# Altium PCB PCB1.PcbDoc (part 3 of 3)
Units mm, origin at the board's own origin, x right, y up, seen from the top; angles counter-clockwise.
Board outline 40 x 42 mm, 4 copper layers (Top Layer, GND, VCC, Bottom Layer), stack 4.941 mm thick; 42 components, 33 nets, 156 pads, 53 vias.
Unrouted connection lines stored in the file: 1.
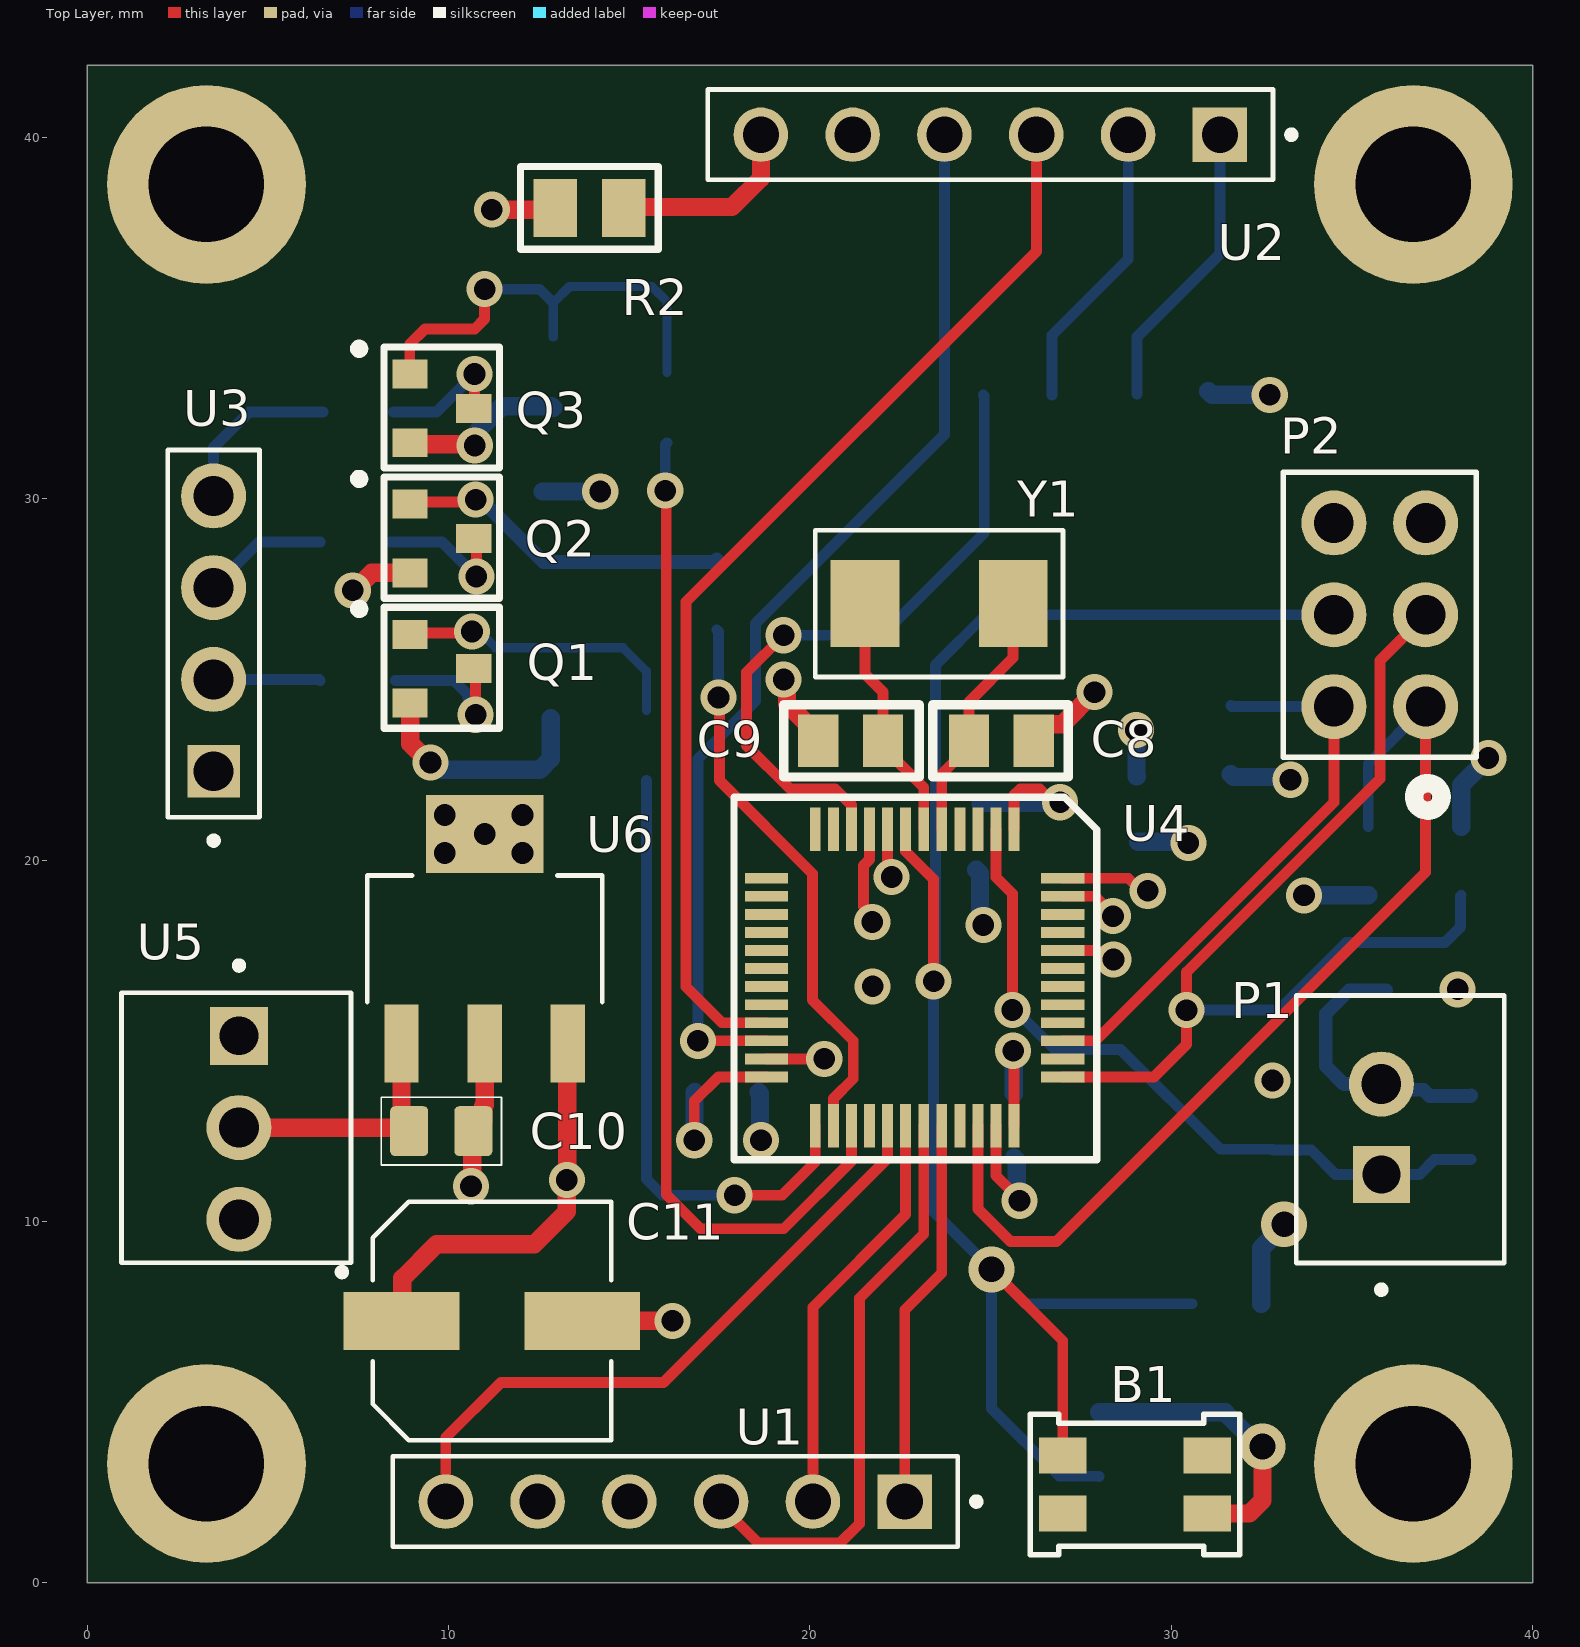
[diagram p0: Top Layer view]

## Part data (continued)
U4: "MCU 32-bit STM32F1 ARM Cortex M3 RISC 64KB Flash 2.5V/3.3V 48-Pin LQFP Tray", Case/Package=LQFP, Clock Frequency=16MHz, Frequency=72MHz, LCSC=C8734, Manufacturer=STMicroelectronics, Manufacturer Package Identifier=ai14911d, Max Operating Temperature=85°C, Max Power Dissipation=363mW, Max Supply Current=50mA, Max Supply Voltage=3.6V, Min Operating Temperature=-40°C, Min Supply Voltage=2V, Nominal Supply Current=1.7µA, Operating Supply Voltage=3.3V, Supplier Part Number=497-6063-ND, ADC Channels (Resolution)="10-Ch 12-Bit", Address Bus Width=32b, Category=Microcontrollers, China RoHS=Compliant, ComponentLink1Description=https://datasheet.octopart.com:443/STM32F103C8T6-STMicroelectronics-datasheet-48026265.pdf?src-supplier=ICpick, ComponentLink1URL=https://datasheet.octopart.com:443/STM32F103C8T6-STMicroelectronics-datasheet-48026265.pdf?src-supplier=ICpick, ComponentLink2Description=https://datasheet.octopart.com:443/STM32F103C8T6-STMicroelectronics-datasheet-10330614.pdf?src-supplier=Newark, ComponentLink2URL=https://datasheet.octopart.com:443/STM32F103C8T6-STMicroelectronics-datasheet-10330614.pdf?src-supplier=Newark, ComponentLink3Description=https://datasheet.octopart.com:443/STM32F103C8T6-STMicroelectronics-datasheet-16839800.pdf?src-supplier=Newark, ComponentLink3URL=https://datasheet.octopart.com:443/STM32F103C8T6-STMicroelectronics-datasheet-16839800.pdf?src-supplier=Newark, ComponentLink4Description=https://datasheet.octopart.com:443/STM32F103C8T6-STMicroelectronics-datasheet-14363502.pdf?src-supplier=Farnell, ComponentLink4URL=https://datasheet.octopart.com:443/STM32F103C8T6-STMicroelectronics-datasheet-14363502.pdf?src-supplier=Farnell, ComponentLink5Description=https://datasheet.octopart.com:443/STM32F103C8T6-STMicroelectronics-datasheet-500013.pdf?src-supplier=Farnell, ComponentLink5URL=https://datasheet.octopart.com:443/STM32F103C8T6-STMicroelectronics-datasheet-500013.pdf?src-supplier=Farnell, ComponentLink6Description=https://datasheet.octopart.com:443/STM32F103C8T6-STMicroelectronics-datasheet-8365036.pdf?src-supplier=Farnell, ComponentLink6URL=https://datasheet.octopart.com:443/STM32F103C8T6-STMicroelectronics-datasheet-8365036.pdf?src-supplier=Farnell, ComponentLink7Description=https://datasheet.octopart.com:443/STM32F103C8T6-STMicroelectronics-datasheet-6396519.pdf?src-supplier=Verical, ComponentLink7URL=https://datasheet.octopart.com:443/STM32F103C8T6-STMicroelectronics-datasheet-6396519.pdf?src-supplier=Verical, ComponentLink8Description=https://datasheet.octopart.com:443/STM32F103C8T6-STMicroelectronics-datasheet-21407612.pdf?src-supplier=element14+APAC, ComponentLink8URL=https://datasheet.octopart.com:443/STM32F103C8T6-STMicroelectronics-datasheet-21407612.pdf?src-supplier=element14+APAC, ComponentLink9Description=https://datasheet.octopart.com:443/STM32F103C8T6-STMicroelectronics-datasheet-8700640.pdf?src-supplier=element14, ComponentLink9URL=https://datasheet.octopart.com:443/STM32F103C8T6-STMicroelectronics-datasheet-8700640.pdf?src-supplier=element14, ComponentLink10Description=https://datasheet.octopart.com:443/STM32F103C8T6-STMicroelectronics-datasheet-177520228.pdf?src-supplier=Burklin+Elektronik, ComponentLink10URL=https://datasheet.octopart.com:443/STM32F103C8T6-STMicroelectronics-datasheet-177520228.pdf?src-supplier=Burklin+Elektronik, ComponentLink11Description=https://datasheet.octopart.com:443/STM32F103C8T6-STMicroelectronics-datasheet-165583531.pdf?src-supplier=SOS+electronic, ComponentLink11URL=https://datasheet.octopart.com:443/STM32F103C8T6-STMicroelectronics-datasheet-165583531.pdf?src-supplier=SOS+electronic, ComponentLink12Description=https://datasheet.octopart.com:443/STM32F103C8T6-STMicroelectronics-datasheet-14106722.pdf?src-supplier=iiiC, ComponentLink12URL=https://datasheet.octopart.com:443/STM32F103C8T6-STMicroelectronics-datasheet-14106722.pdf?src-supplier=iiiC, ComponentLink13Description=https://datasheet.octopart.com:443/STM32F103C8T6-STMicroelectronics-datasheet-17594274.pdf?src-supplier=TME, ComponentLink13URL=https://datasheet.octopart.com:443/STM32F103C8T6-STMicroelectronics-datasheet-17594274.pdf?src-supplier=TME, ComponentLink14Description=https://datasheet.octopart.com:443/STM32F103C8T6-STMicroelectronics-datasheet-148251.pdf?src-supplier=Nu+Horizons, ComponentLink14URL=https://datasheet.octopart.com:443/STM32F103C8T6-STMicroelectronics-datasheet-148251.pdf?src-supplier=Nu+Horizons, Core Architecture=ARM, Data Bus Width=32b, Density=512kb, EEPROM Memory Size=0B, Flash Memory Size=64kB, Height=1.45mm, Height - Seated (Max)=1.6mm, Interface="CAN, USB", Lead Free="Lead Free", Length=7mm, Lifecycle Status=Production, Manufacturer Part Number=STM32F103C8T6, Memory Format=FLASH, Memory Size=64kB, Mounting Technology="Surface Mount", Number of A/D Converters=2, Number of ADC Channels=10, Number of Bits=32, Number of Channels=10, Number of I2C Channels=2, Number of I/Os=37, Number of Interrupts=16, Number of Programmable I/O=48, Number of PWM Channels=1, Number of SPI Channels=2, Number of Terminals=48, Number of Timers/Counters=4, Number of USART Channels=3, Oscillator Type=Internal, Peripherals=POR, Pins=48, Pricing="1=6,08, 10=4,662, 25=4,3084, 100=3,9192, 250=3,73372, 500=3,6219, 1000=3,5299, 2500=3,43276 (USD)", Radiation Hardening=No, RAM Size=20kB, REACH SVHC=Yes, RoHS=Compliant, Schedule B=8542310000, Stock=4493, Supplier=DigiKey, Terminal Pitch=500µm, Termination=SMD/SMT, Watchdog Timer=Yes, Width=7mm
U5: "KK 254 Solid Header, Vertical, with Friction Lock, 3 Circuits, Tin (Sn) Plating, Bag", Color=White, Contact Resistance=10mΩ, Current Rating=4A, Dielectric Material=Polyamide, Flammability Rating="UL94 V-0", Insulation Resistance=1GΩ, LCSC=C234181, Manufacturer=Molex, Manufacturer Lifecycle Status=ACTIVE, Max Operating Temperature=75°C, Min Operating Temperature=0°C, Operating Force=4.8928N, Supplier Part Number=WM4201-ND, Voltage Rating=500V, Voltage Rating (DC)=250V, Approvals="CSA, UL", Category="Headers and Wire Housings", China RoHS=Compliant, ComponentLink1Description=https://sigma.octopart.com:443/153641738/technical_drawing/Molex-22232031.pdf?src-supplier=Sager+Electronics, ComponentLink1URL=https://sigma.octopart.com:443/153641738/technical_drawing/Molex-22232031.pdf?src-supplier=Sager+Electronics, ComponentLink2Description=https://datasheet.octopart.com:443/0022232031-Molex-datasheet-164461539.pdf?src-supplier=Sager+Electronics, ComponentLink2URL=https://datasheet.octopart.com:443/0022232031-Molex-datasheet-164461539.pdf?src-supplier=Sager+Electronics, ComponentLink3Description=https://datasheet.octopart.com:443/22-23-2031-Molex-datasheet-10979265.pdf?src-supplier=Upverter, ComponentLink3URL=https://datasheet.octopart.com:443/22-23-2031-Molex-datasheet-10979265.pdf?src-supplier=Upverter, ComponentLink4Description=https://datasheet.octopart.com:443/22-23-2031-Molex-datasheet-8803345.pdf?src-supplier=Upverter, ComponentLink4URL=https://datasheet.octopart.com:443/22-23-2031-Molex-datasheet-8803345.pdf?src-supplier=Upverter, ComponentLink5Description=https://datasheet.octopart.com:443/022232031-Molex-datasheet-8349839.pdf?src-supplier=Upverter, ComponentLink5URL=https://datasheet.octopart.com:443/022232031-Molex-datasheet-8349839.pdf?src-supplier=Upverter, ComponentLink6Description=https://datasheet.octopart.com:443/22-23-2031-Molex-datasheet-137053720.pdf?src-supplier=IHS, ComponentLink6URL=https://datasheet.octopart.com:443/22-23-2031-Molex-datasheet-137053720.pdf?src-supplier=IHS, ComponentLink7Description=https://datasheet.octopart.com:443/A-6373-03A222-Molex-datasheet-11014486.pdf?src-supplier=IHS, ComponentLink7URL=https://datasheet.octopart.com:443/A-6373-03A222-Molex-datasheet-11014486.pdf?src-supplier=IHS, ComponentLink8Description=https://datasheet.octopart.com:443/22-23-2031-Molex-datasheet-13784869.pdf?src-supplier=Molex, ComponentLink8URL=https://datasheet.octopart.com:443/22-23-2031-Molex-datasheet-13784869.pdf?src-supplier=Molex, ComponentLink9Description=https://sigma.octopart.com:443/16295904/technical_drawing/Molex-22-23-2031.pdf?src-supplier=Molex, ComponentLink9URL=https://sigma.octopart.com:443/16295904/technical_drawing/Molex-22-23-2031.pdf?src-supplier=Molex, ComponentLink10Description=https://datasheet.octopart.com:443/22-23-2031-Molex-datasheet-154747105.pdf?src-supplier=Master+Electronics, ComponentLink10URL=https://datasheet.octopart.com:443/22-23-2031-Molex-datasheet-154747105.pdf?src-supplier=Master+Electronics, ComponentLink11Description=https://datasheet.octopart.com:443/22-23-2031-Molex-datasheet-101581837.pdf?src-supplier=Farnell, ComponentLink11URL=https://datasheet.octopart.com:443/22-23-2031-Molex-datasheet-101581837.pdf?src-supplier=Farnell, ComponentLink12Description=https://datasheet.octopart.com:443/22-23-2031-Molex-datasheet-6994.pdf?src-supplier=Farnell, ComponentLink12URL=https://datasheet.octopart.com:443/22-23-2031-Molex-datasheet-6994.pdf?src-supplier=Farnell, ComponentLink13Description=https://datasheet.octopart.com:443/22-23-2031-Molex-datasheet-15766289.pdf?src-supplier=Farnell, ComponentLink13URL=https://datasheet.octopart.com:443/22-23-2031-Molex-datasheet-15766289.pdf?src-supplier=Farnell, ComponentLink14Description=https://datasheet.octopart.com:443/22-23-2031-Molex-datasheet-11538079.pdf?src-supplier=Farnell, ComponentLink14URL=https://datasheet.octopart.com:443/22-23-2031-Molex-datasheet-11538079.pdf?src-supplier=Farnell, ComponentLink15Description=https://datasheet.octopart.com:443/22-23-2031-Molex-datasheet-21538527.pdf?src-supplier=Electro+Sonic, ComponentLink15URL=https://datasheet.octopart.com:443/22-23-2031-Molex-datasheet-21538527.pdf?src-supplier=Electro+Sonic, ComponentLink16Description=https://datasheet.octopart.com:443/22-23-2031-Molex-datasheet-62103463.pdf?src-supplier=Electro+Sonic, ComponentLink16URL=https://datasheet.octopart.com:443/22-23-2031-Molex-datasheet-62103463.pdf?src-supplier=Electro+Sonic, ComponentLink17Description=https://datasheet.octopart.com:443/22-23-2031-Molex-datasheet-37168844.pdf?src-supplier=Electro+Sonic, ComponentLink17URL=https://datasheet.octopart.com:443/22-23-2031-Molex-datasheet-37168844.pdf?src-supplier=Electro+Sonic, ComponentLink18Description=https://datasheet.octopart.com:443/22-23-2031-Molex-datasheet-26579529.pdf?src-supplier=TME, ComponentLink18URL=https://datasheet.octopart.com:443/22-23-2031-Molex-datasheet-26579529.pdf?src-supplier=TME, ComponentLink19Description=https://datasheet.octopart.com:443/22-23-2031-Molex-datasheet-140181014.pdf?src-supplier=RS+(Formerly+Allied+Electronics), ComponentLink19URL=https://datasheet.octopart.com:443/22-23-2031-Molex-datasheet-140181014.pdf?src-supplier=RS+(Formerly+Allied+Electronics), ComponentLink20Description=https://datasheet.octopart.com:443/22-23-2031-Molex-datasheet-120145304.pdf?src-supplier=RS+(Formerly+Allied+Electronics), ComponentLink20URL=https://datasheet.octopart.com:443/22-23-2031-Molex-datasheet-120145304.pdf?src-supplier=RS+(Formerly+Allied+Electronics), ComponentLink21Description=https://datasheet.octopart.com:443/22-23-2031-Molex-datasheet-9904594.pdf?src-supplier=RS+(Formerly+Allied+Electronics), ComponentLink21URL=https://datasheet.octopart.com:443/22-23-2031-Molex-datasheet-9904594.pdf?src-supplier=RS+(Formerly+Allied+Electronics), ComponentLink22Description=https://datasheet.octopart.com:443/22-23-2031-Molex-datasheet-36197.pdf?src-supplier=RS+(Formerly+Allied+Electronics), ComponentLink22URL=https://datasheet.octopart.com:443/22-23-2031-Molex-datasheet-36197.pdf?src-supplier=RS+(Formerly+Allied+Electronics), ComponentLink23Description=https://datasheet.octopart.com:443/22232031-Molex-datasheet-137316104.pdf?src-supplier=Future+Electronics, ComponentLink23URL=https://datasheet.octopart.com:443/22232031-Molex-datasheet-137316104.pdf?src-supplier=Future+Electronics, ComponentLink24Description=https://datasheet.octopart.com:443/22-23-2031-Molex-datasheet-33002316.pdf?src-supplier=Newark, ComponentLink24URL=https://datasheet.octopart.com:443/22-23-2031-Molex-datasheet-33002316.pdf?src-supplier=Newark, ComponentLink25Description=https://datasheet.octopart.com:443/22-23-2031-Molex-datasheet-21206926.pdf?src-supplier=Newark, ComponentLink25URL=https://datasheet.octopart.com:443/22-23-2031-Molex-datasheet-21206926.pdf?src-supplier=Newark, ComponentLink26Description=https://datasheet.octopart.com:443/0022232031-Molex-datasheet-11893140.pdf?src-supplier=Arrow+Electronics, ComponentLink26URL=https://datasheet.octopart.com:443/0022232031-Molex-datasheet-11893140.pdf?src-supplier=Arrow+Electronics, ComponentLink27Description=https://datasheet.octopart.com:443/0022232031-Molex-datasheet-11631538.pdf?src-supplier=Arrow+Electronics, ComponentLink27URL=https://datasheet.octopart.com:443/0022232031-Molex-datasheet-11631538.pdf?src-supplier=Arrow+Electronics, ComponentLink28Description=https://datasheet.octopart.com:443/22-23-2031-Molex-datasheet-8399138.pdf?src-supplier=Verical, ComponentLink28URL=https://datasheet.octopart.com:443/22-23-2031-Molex-datasheet-8399138.pdf?src-supplier=Verical, ComponentLink29Description=https://datasheet.octopart.com:443/22-23-2031-Molex-datasheet-8339045.pdf?src-supplier=Verical, ComponentLink29URL=https://datasheet.octopart.com:443/22-23-2031-Molex-datasheet-8339045.pdf?src-supplier=Verical, ComponentLink30Description=https://datasheet.octopart.com:443/22232031-Molex-datasheet-7831523.pdf?src-supplier=Jameco, ComponentLink30URL=https://datasheet.octopart.com:443/22232031-Molex-datasheet-7831523.pdf?src-supplier=Jameco, ComponentLink31Description=https://datasheet.octopart.com:443/22-23-2031-Molex-datasheet-7276997.pdf?src-supplier=Jameco, ComponentLink31URL=https://datasheet.octopart.com:443/22-23-2031-Molex-datasheet-7276997.pdf?src-supplier=Jameco, ComponentLink32Description=https://datasheet.octopart.com:443/22-23-2031-Molex-datasheet-145352.pdf?src-supplier=DigiKey, ComponentLink32URL=https://datasheet.octopart.com:443/22-23-2031-Molex-datasheet-145352.pdf?src-supplier=DigiKey, ComponentLink33Description=http://sigma.octopart.com:80/16297233/rohs_statement/Molex-22-23-2031.pdf?src-supplier=Compliance+Statements, ComponentLink33URL=http://sigma.octopart.com:80/16297233/rohs_statement/Molex-22-23-2031.pdf?src-supplier=Compliance+Statements, ComponentLink34Description=http://sigma.octopart.com:80/conflict_mineral_statement/Molex-company-72.pdf?src-supplier=Compliance+Statements, ComponentLink34URL=http://sigma.octopart.com:80/conflict_mineral_statement/Molex-company-72.pdf?src-supplier=Compliance+Statements, ComponentLink35Description=http://sigma.octopart.com:80/rohs_statement/Molex-company-73.pdf?src-supplier=Compliance+Statements, ComponentLink35URL=http://sigma.octopart.com:80/rohs_statement/Molex-company-73.pdf?src-supplier=Compliance+Statements, ComponentLink36Description=http://sigma.octopart.com:80/reach_statement/Molex-company-74.pdf?src-supplier=Compliance+Statements, ComponentLink36URL=http://sigma.octopart.com:80/reach_statement/Molex-company-74.pdf?src-supplier=Compliance+Statements, Contact Gender=Male, Contact Material=Brass, Contact Plating=Tin, Country of Origin=US, Depth=6.35mm, Gender=Male, Glow Wire Compliant=Non-compliant, Halogen Free="Low Halogen", Height=10mm, Housing Color=White, Housing Material=Nylon, Lead Free="Lead Free", Lead Pitch=2.54mm, Length=10mm, Lifecycle Status=Production, Manufacturer Part Number=22-23-2031, Max Current Rating=4A, Mounting Technology="Through Hole", Number of Circuits=2, Number of Contacts=3, Number of Lines=1, Number of Poles=3, Number of Positions=3, Number of Rows=1, Orientation=Vertical, Packaging=Bulk, Pins=3, Pitch=2.54mm, Plating Thickness=2.54µm, Pricing="1=0,22, 10=0,189, 100=0,1608, 500=0,1435, 2000=0,13012, 6000=0,12041, 10000=0,11614 (USD)", Radiation Hardening=No, REACH SVHC=Yes, RoHS=Compliant, Schedule B="8536694040, 8536694040|8536694040|8536694040|8536694040|8536694040|8536694040|8536694040|8536694040|8536694040|8536694040|8536694040|8536694040|8536694040|8536694040|8536694040|8536694040|8536694040|8536694040|8536694040|8536694040|8536694040|8536694040|8536694040|85", Stock=60929, Supplier=DigiKey, Terminal Pitch=2.54mm, Termination=Solder, Width=10mm
U6: "1-A, low-dropout voltage regulator for 5-V to 3.3-V conversion 4-SOT-223 -40 to 125", Case/Package=SOT-223, Dropout Voltage=500mV, Manufacturer="Texas Instruments", Manufacturer Lifecycle Status=ACTIVE, Max Junction Temperature (Tj)=125°C, Max Output current=1A, Max Supply Voltage=7.5V, Min Input Voltage=4.5V, Min Operating Temperature=-40°C, Output Voltage=3.3V, Quiescent Current=15mA, Accuracy=2.5%, Category="LDO Voltage Regulators", ComponentLink1Description=https://datasheet.octopart.com:443/LM3940IMPX-3.3-NOPB-Texas-Instruments-datasheet-37536452.pdf?src-supplier=Newark, ComponentLink1URL=https://datasheet.octopart.com:443/LM3940IMPX-3.3-NOPB-Texas-Instruments-datasheet-37536452.pdf?src-supplier=Newark, ComponentLink2Description=https://octopart.com:443/opatz8j6/c1?t=rvScTgIK7vzGzAkcs3Wrvb9UenW83nfYWqCYLRye1rllSdu9Beb0mrJ0jD3mxUE6L-G7r_WbA31oL6rbbcgGDwhvoCgJFhaPP2VcxwGiGkxkzw7jExuaO0qB7YjUEg7HO7wm7e8udALi6wjH3PcZfiOv8hqrGiPpD-c1dsCFFWiVgt4LsZWsN__Uwh1l8CkFPX6hFz62SNLgqesLCarricQSPLGZ_8-1w0Pi7AlFfsyeMSiSWLufX8N49_LiouBqoH5-Z8RZTzh6Rrh-S45GR5BvH6gVbYU3j4QdNB2550tcQlHMcE_JD-4k9aWhtYDm6rSzGkys3-qF4FGYb97CU4akCkkKKwscATKRo0mvSF3ub_RgSZQsh-CWTHPIweVGU4n0TA&src-supplier=Texas+Instruments, ComponentLink2URL=https://octopart.com:443/opatz8j6/c1?t=rvScTgIK7vzGzAkcs3Wrvb9UenW83nfYWqCYLRye1rllSdu9Beb0mrJ0jD3mxUE6L-G7r_WbA31oL6rbbcgGDwhvoCgJFhaPP2VcxwGiGkxkzw7jExuaO0qB7YjUEg7HO7wm7e8udALi6wjH3PcZfiOv8hqrGiPpD-c1dsCFFWiVgt4LsZWsN__Uwh1l8CkFPX6hFz62SNLgqesLCarricQSPLGZ_8-1w0Pi7AlFfsyeMSiSWLufX8N49_LiouBqoH5-Z8RZTzh6Rrh-S45GR5BvH6gVbYU3j4QdNB2550tcQlHMcE_JD-4k9aWhtYDm6rSzGkys3-qF4FGYb97CU4akCkkKKwscATKRo0mvSF3ub_RgSZQsh-CWTHPIweVGU4n0TA&src-supplier=Texas+Instruments, ComponentLink3Description=https://datasheet.octopart.com:443/LM3940IMPX-3.3-NOPB-Texas-Instruments-datasheet-32868818.pdf?src-supplier=Texas+Instruments, ComponentLink3URL=https://datasheet.octopart.com:443/LM3940IMPX-3.3-NOPB-Texas-Instruments-datasheet-32868818.pdf?src-supplier=Texas+Instruments, ComponentLink4Description=https://datasheet.octopart.com:443/LM3940IMPX-3.3-NOPB-Texas-Instruments-datasheet-14540343.pdf?src-supplier=Texas+Instruments, ComponentLink4URL=https://datasheet.octopart.com:443/LM3940IMPX-3.3-NOPB-Texas-Instruments-datasheet-14540343.pdf?src-supplier=Texas+Instruments, ComponentLink5Description=https://datasheet.octopart.com:443/LM3940IMPX-3.3/NOPB-Texas-Instruments-datasheet-12544179.pdf?src-supplier=Texas+Instruments, ComponentLink5URL=https://datasheet.octopart.com:443/LM3940IMPX-3.3/NOPB-Texas-Instruments-datasheet-12544179.pdf?src-supplier=Texas+Instruments, ComponentLink6Description=https://datasheet.octopart.com:443/LM3940IMPX-3.3/NOPB-Texas-Instruments-datasheet-10846469.pdf?src-supplier=Texas+Instruments, ComponentLink6URL=https://datasheet.octopart.com:443/LM3940IMPX-3.3/NOPB-Texas-Instruments-datasheet-10846469.pdf?src-supplier=Texas+Instruments, ComponentLink7Description=https://sigma.octopart.com:443/49253063/technical_drawing/Texas-Instruments-LM3940IMPX-3.3-NOPB.pdf?src-supplier=Texas+Instruments, ComponentLink7URL=https://sigma.octopart.com:443/49253063/technical_drawing/Texas-Instruments-LM3940IMPX-3.3-NOPB.pdf?src-supplier=Texas+Instruments, ComponentLink8Description=https://datasheet.octopart.com:443/LM3940IMPX-3.3-NOPB-Texas-Instruments-datasheet-159115208.pdf?src-supplier=Augswan, ComponentLink8URL=https://datasheet.octopart.com:443/LM3940IMPX-3.3-NOPB-Texas-Instruments-datasheet-159115208.pdf?src-supplier=Augswan, ComponentLink9Description=https://datasheet.octopart.com:443/LM3940IMPX-3.3-NOPB-Texas-Instruments-datasheet-62292511.pdf?src-supplier=Farnell, ComponentLink9URL=https://datasheet.octopart.com:443/LM3940IMPX-3.3-NOPB-Texas-Instruments-datasheet-62292511.pdf?src-supplier=Farnell, ComponentLink10Description=https://datasheet.octopart.com:443/LM3940IMPX-3.3-NOPB-Texas-Instruments-datasheet-68295779.pdf?src-supplier=Farnell, ComponentLink10URL=https://datasheet.octopart.com:443/LM3940IMPX-3.3-NOPB-Texas-Instruments-datasheet-68295779.pdf?src-supplier=Farnell, ComponentLink11Description=https://datasheet.octopart.com:443/LM3940IMPX-3.3-NOPB-Texas-Instruments-datasheet-165804071.pdf?src-supplier=LCSC, ComponentLink11URL=https://datasheet.octopart.com:443/LM3940IMPX-3.3-NOPB-Texas-Instruments-datasheet-165804071.pdf?src-supplier=LCSC, ComponentLink12Description=https://datasheet.octopart.com:443/LM3940IMPX-3.3-NOPB-Texas-Instruments-datasheet-137316104.pdf?src-supplier=Future+Electronics, ComponentLink12URL=https://datasheet.octopart.com:443/LM3940IMPX-3.3-NOPB-Texas-Instruments-datasheet-137316104.pdf?src-supplier=Future+Electronics, ComponentLink13Description=https://datasheet.octopart.com:443/LM3940IMPX-3.3/NOPB-National-Semiconductor-datasheet-128782.pdf?src-supplier=Future+Electronics, ComponentLink13URL=https://datasheet.octopart.com:443/LM3940IMPX-3.3/NOPB-National-Semiconductor-datasheet-128782.pdf?src-supplier=Future+Electronics, ComponentLink14Description=https://datasheet.octopart.com:443/LM3940IMPX-3.3-NOPB-Texas-Instruments-datasheet-8441755.pdf?src-supplier=Jameco, ComponentLink14URL=https://datasheet.octopart.com:443/LM3940IMPX-3.3-NOPB-Texas-Instruments-datasheet-8441755.pdf?src-supplier=Jameco, ComponentLink15Description=http://sigma.octopart.com:80/reach_statement/Texas-Instruments-company-64.pdf?src-supplier=Compliance+Statements, ComponentLink15URL=http://sigma.octopart.com:80/reach_statement/Texas-Instruments-company-64.pdf?src-supplier=Compliance+Statements, ComponentLink16Description=http://sigma.octopart.com:80/conflict_mineral_statement/Texas-Instruments-company-63.pdf?src-supplier=Compliance+Statements, ComponentLink16URL=http://sigma.octopart.com:80/conflict_mineral_statement/Texas-Instruments-company-63.pdf?src-supplier=Compliance+Statements, Contact Plating=Tin, Height=1.8mm, Lead Free="Lead Free", Length=6.5mm, Lifecycle Status=Production, Manufacturer Part Number=LM3940IMPX-3.3/NOPB, Max Operating Temperature=125°C, Min Supply Voltage=4.5V, Mounting Technology="Surface Mount", Number of Channels=1, Number of Outputs=1, Number of Regulators=1, Output Current=1A, Output Type=Fixed, Pins=4, Polarity=Positive, Pricing="2000=0,8378, 4000=0,805 (USD)", Radiation Hardening=No, RoHS=Compliant, Schedule B="8542390000, 8542390000|8542390000|8542390000|8542390000|8542390000", Stock=4000, Supplier="Arrow Electronics", Supplier Part Number=LM3940IMPX-3.3/NOPB, Thickness=1.6mm, Width=3.5mm
Y1: library part ABM3-8.000MHZ-D2Y-T, "Crystal 8MHz ±20ppm (Tol) ±30ppm (Stability) 18pF FUND 140Ohm 2-Pin Mini-CSMD T/R", Case/Package=CSMD, ESR (Equivalent Series Resistance)=140Ω, Frequency Stability=30ppm, Frequency Tolerance=0.002%, LCSC=C144380, Load Capacitance=18pF, Manufacturer=Abracon, Max Operating Temperature=85°C, Min Operating Temperature=-40°C, Supplier Part Number=535-10630-1-ND, Category=Crystals, China RoHS=Non-Compliant, ComponentLink1Description=https://datasheet.octopart.com:443/ABM3-8.000MHZ-D2Y-T-Abracon-datasheet-182205007.pdf?src-supplier=TME, ComponentLink1URL=https://datasheet.octopart.com:443/ABM3-8.000MHZ-D2Y-T-Abracon-datasheet-182205007.pdf?src-supplier=TME, ComponentLink2Description=https://datasheet.octopart.com:443/ABM3-8.000MHZ-D2Y-T-Abracon-datasheet-32780515.pdf?src-supplier=element14+APAC, ComponentLink2URL=https://datasheet.octopart.com:443/ABM3-8.000MHZ-D2Y-T-Abracon-datasheet-32780515.pdf?src-supplier=element14+APAC, ComponentLink3Description=https://datasheet.octopart.com:443/ABM3-8.000MHZ-D2Y-T-Abracon-datasheet-13417521.pdf?src-supplier=element14+APAC, ComponentLink3URL=https://datasheet.octopart.com:443/ABM3-8.000MHZ-D2Y-T-Abracon-datasheet-13417521.pdf?src-supplier=element14+APAC, ComponentLink4Description=https://datasheet.octopart.com:443/ABM3-8.000MHZ-D2Y-T-Abracon-datasheet-8862594.pdf?src-supplier=element14+APAC, ComponentLink4URL=https://datasheet.octopart.com:443/ABM3-8.000MHZ-D2Y-T-Abracon-datasheet-8862594.pdf?src-supplier=element14+APAC, ComponentLink5Description=https://datasheet.octopart.com:443/ABM3-8.000MHZ-D2Y-T-Abracon-datasheet-8853172.pdf?src-supplier=element14+APAC, ComponentLink5URL=https://datasheet.octopart.com:443/ABM3-8.000MHZ-D2Y-T-Abracon-datasheet-8853172.pdf?src-supplier=element14+APAC, ComponentLink6Description=https://datasheet.octopart.com:443/ABM3-8.000MHZ-D2Y-T-Abracon-datasheet-8835795.pdf?src-supplier=element14+APAC, ComponentLink6URL=https://datasheet.octopart.com:443/ABM3-8.000MHZ-D2Y-T-Abracon-datasheet-8835795.pdf?src-supplier=element14+APAC, ComponentLink7Description=https://datasheet.octopart.com:443/ABM3-8.000MHZ-D2Y-T-Abracon-datasheet-8815637.pdf?src-supplier=element14+APAC, ComponentLink7URL=https://datasheet.octopart.com:443/ABM3-8.000MHZ-D2Y-T-Abracon-datasheet-8815637.pdf?src-supplier=element14+APAC, ComponentLink8Description=https://datasheet.octopart.com:443/ABM3-8.000MHZ-D2Y-T-Abracon-datasheet-8808528.pdf?src-supplier=element14+APAC, ComponentLink8URL=https://datasheet.octopart.com:443/ABM3-8.000MHZ-D2Y-T-Abracon-datasheet-8808528.pdf?src-supplier=element14+APAC, ComponentLink9Description=https://datasheet.octopart.com:443/ABM3-8.000MHZ-D2Y-T-Abracon-datasheet-8488864.pdf?src-supplier=element14+APAC, ComponentLink9URL=https://datasheet.octopart.com:443/ABM3-8.000MHZ-D2Y-T-Abracon-datasheet-8488864.pdf?src-supplier=element14+APAC, ComponentLink10Description=https://datasheet.octopart.com:443/ABM3-8.000MHZ-D2Y-T-Abracon-datasheet-8324950.pdf?src-supplier=element14+APAC, ComponentLink10URL=https://datasheet.octopart.com:443/ABM3-8.000MHZ-D2Y-T-Abracon-datasheet-8324950.pdf?src-supplier=element14+APAC, ComponentLink11Description=https://datasheet.octopart.com:443/ABM3-8.000MHZ-D2Y-T-Abracon-datasheet-577709.pdf?src-supplier=element14+APAC, ComponentLink11URL=https://datasheet.octopart.com:443/ABM3-8.000MHZ-D2Y-T-Abracon-datasheet-577709.pdf?src-supplier=element14+APAC, ComponentLink12Description=https://datasheet.octopart.com:443/ABM3-8.000MHZ-D2Y-T-Abracon-datasheet-154724144.pdf?src-supplier=Sager+Electronics, ComponentLink12URL=https://datasheet.octopart.com:443/ABM3-8.000MHZ-D2Y-T-Abracon-datasheet-154724144.pdf?src-supplier=Sager+Electronics, ComponentLink13Description=https://datasheet.octopart.com:443/ABM3-8.000MHZ-D2Y-T-Abracon-datasheet-128558659.pdf?src-supplier=X-ON, ComponentLink13URL=https://datasheet.octopart.com:443/ABM3-8.000MHZ-D2Y-T-Abracon-datasheet-128558659.pdf?src-supplier=X-ON, ComponentLink14Description=https://sigma.octopart.com:443/138895675/technical_drawing/Abracon-ABM3-8.000MHZ-D2Y-T.pdf?src-supplier=Abracon+SCT, ComponentLink14URL=https://sigma.octopart.com:443/138895675/technical_drawing/Abracon-ABM3-8.000MHZ-D2Y-T.pdf?src-supplier=Abracon+SCT, ComponentLink15Description=https://datasheet.octopart.com:443/ABM3-8.000MHZ-D2Y-T-Abracon-datasheet-12514944.pdf?src-supplier=Farnell, ComponentLink15URL=https://datasheet.octopart.com:443/ABM3-8.000MHZ-D2Y-T-Abracon-datasheet-12514944.pdf?src-supplier=Farnell, ComponentLink16Description=http://sigma.octopart.com:80/conflict_mineral_statement/Abracon-company-27.pdf?src-supplier=Compliance+Statements, ComponentLink16URL=http://sigma.octopart.com:80/conflict_mineral_statement/Abracon-company-27.pdf?src-supplier=Compliance+Statements, Composition=Ceramic, Depth=3.2mm, ESR=140Ω, Frequency=8MHz, Height=1.3mm, Lead Free="Lead Free", Length=5mm, Lifecycle Status=Production, Manufacturer Part Number=ABM3-8.000MHZ-D2Y-T, Mounting Technology="Surface Mount", Packaging="Cut Tape", Pins=2, Pricing="1=0,67, 10=0,585, 25=0,5536, 50=0,5306, 100=0,5087, 250=0,48104, 500=0,46114 (USD)", Radiation Hardening=No, REACH SVHC=Yes, RoHS=Compliant, Schedule B="8541600025, 8541600025|8541600025|8541600025|8541600025|8541600025|8541600025|8541600025|8541600025|8541600025|8541600025|8541600025|8541600025|8541600025|8541600025|8541600025|8541600025|8541600025|8541600025|8541600025|8541600025|8541600025|8541600025|8541600025|85", Stock=32401, Supplier=DigiKey, Termination=SMD/SMT, Tolerance=0.002%, Width=3.2mm

## Free pads (board coordinates)
  round 5.5 hole 3.2: 1(3.3,3.3) 1(3.3,38.7) 1(36.7,3.3) 1(36.7,38.7)

## Via types
v1: diameter 1, hole 0.6, Top Layer to Bottom Layer, tented both sides, 50 vias
v2: diameter 1.27, hole 0.711, Top Layer to Bottom Layer, 3 vias

## Nets (pads, with @x,y where several pads share a name; then routed paths per layer and width w, separated by ;. In a path a pad name is that pad's centre, name@x,y a point inside that pad or via, vN(x,y) a via of type N, cw(c..) or ccw(c..) an arc to the next point about the centre after c; other vN are vias at no path point)
BLUE: R12.1 U4.27 | length 27.7
  Top Layer w0.3: v1@16.025,29.873 16.025,10.747 16.972,9.8 19.275,9.8 21.15,11.675 U4.27
  Bottom Layer w0.3: v1(16,30.225) 16,31.5 R12.1
BOT: C1.1 P1.1 R10.2 U4.2 | length 19.9
  Top Layer w0.3: U4.2 25.15,19.525 25.603,19.072 v1(25.603,15.852)
  Bottom Layer w0.3: v1(25.603,15.852) 25.685,15.852 26.774,14.763 28.599,14.763 31.362,12 R10.2 32.824,11.976 33.874,11.976 34.547,11.303 P1.1 35.816,11.301 36.876,11.301 37.286,11.712 C1.1
DTR: R3.1 U4.10 | length 18.3
  Top Layer w0.3: v1(19.275,26.225) 18.25,25.2 18.25,23.175 19.45,21.975 20.7,21.975 21.15,21.525 U4.10
  Bottom Layer w0.3: v1(19.275,26.225) 22,26.225 24.825,29.05 24.825,32.85 R3.1
EN: U1.6 U4.29 | length 18.1
  Top Layer w0.3: U1.6 9.925,4.025 11.449,5.549 15.952,5.549 22.15,11.747 U4.29
GND: B1.3 C2.1 C3.1 C4.1 C5.2 C6.2 C7.2 C8.1 C9.1 C10.2 C11.2 P2.5 Q1.2 Q2.2 Q3.2 R6.1 R9.1 R11.2 R14.1 U1.4 U2.5 U4.8 U4.23 U4.35 U4.44 U4.47 U5.3 U6.2 U6.4 | length 47.5
  Top Layer w0.3: U4.23 v1(20.4,14.5) ; U4.8 22.15,19.645 v1(22.262,19.534) ; U4.35 25.15,11.269 25.8,10.619 v1(25.8,10.575) ; U4.44 27.961,17.5 28.211,17.25 v1(28.4,17.25) ; U4.47 27.888,19 28.387,18.501 v1(28.387,18.45)
  Top Layer w0.508: v1(7.352,27.465) 7.391,27.465 7.876,27.95 Q2.2 ; Q1.2 8.93,24.213 8.94,24.203 8.94,23.225 9.465,22.7 v1(9.5,22.7) ; Q3.2 8.969,31.511 10.686,31.511 v1(10.725,31.472) ; v1(10.625,10.975) 10.657,11.007 C10.2@10.657,12.207 ; C10.2 10.959,12.771 10.959,13.193 11,13.234 U6.2 ; C11.2 v1(16.2,7.25) ; v1(19.275,25) 19.369,24.906 19.369,24.327 20.231,23.465 C9.1 ; C8.1 26.197,23.453 26.502,23.758 26.983,23.758 v1(27.875,24.65) ; B1.3 32.165,1.922 32.525,2.282 v2(32.525,3.775)
  Bottom Layer w0.508: v1(9.5,22.7) 9.633,22.7 9.833,22.5 12.527,22.5 12.825,22.798 R6.1 ; v1(10.725,31.472) 10.819,31.566 10.819,31.894 11.487,32.562 12.852,32.562 R14.1@12.895,32.52 ; R9.1@12.6,30.2 v1(14.2,30.2) ; C7.2 18.619,13.544 18.619,12.281 v1(18.65,12.25) ; v1@20.267,14.5 v1(20.4,14.5) ; C3.1@24.6,19.734 24.707,19.627 24.707,18.298 v1(24.801,18.204) ; C4.1 25.725,11.687 25.725,10.65 v1(25.8,10.575) ; C5.2 31.491,4.717 32.433,3.775 v2(32.525,3.775) ; v1(29.025,23.6) 29.037,23.588 29.037,22.326 C6.2
  other v1: 37.925,16.425 21.738,16.506 9.9,20.2 12.05,20.2 11,20.725 9.9,21.25 12.05,21.25
GREEN: R7.1 U4.26 | length 15.5
  Top Layer w0.3: v1(17.473,24.5) 17.5,24.473 17.5,22.2 20.075,19.625 20.075,16.125 21.2,15 21.2,13.95 20.65,13.4 U4.26
  Bottom Layer w0.3: R7.1 17.473,26.327 v1(17.473,24.5)
NetC1_2: C1.2 P1.2 R11.1 | length 7.8
  Bottom Layer w0.381: R11.1 34.925,16.4 34.275,15.75 34.275,14.3 34.772,13.803 P1.2 35.97,13.647 36.978,13.647 37.15,13.475 38.287,13.475 C1.2
NetQ1_1: Q1.1 R4.2 R6.2 | length 8.1
  Top Layer w0.3: Q1.1 8.969,26.289 10.611,26.289 v1(10.65,26.328)
  Bottom Layer w0.254: v1(10.65,26.328) 10.852,26.328 11.305,25.875 14.825,25.875 15.475,25.225 R4.2
NetQ1_3: Q1.3 R5.1 | length 4.1
  Top Layer w0.3: Q1.3@10.7,25.289 10.75,25.239 v1(10.75,24.025)
  Bottom Layer w0.3: R5.1 10.144,24.975 10.534,24.585 10.534,24.43 10.75,24.214 v1(10.75,24.025)
NetQ2_1: Q2.1 R7.2 R9.2 | length 9.5
  Top Layer w0.3: Q2.1 9.015,29.85 9.14,29.975 9.226,30.061 9.226,29.889 9.249,29.913 10.687,29.913 v1(10.75,29.975)
  Bottom Layer w0.381: v1(10.75,29.975) 10.9,29.975 12.625,28.25 17.35,28.25 R7.2
NetQ2_3: Q2.3 R8.1 | length 3.8
  Top Layer w0.3: Q2.3@10.744,28.9 10.772,28.872 v1(10.772,27.847)
  Bottom Layer w0.3: R8.1 9.818,28.801 v1(10.772,27.847)
NetQ3_1: Q3.1 R12.2 R14.2 | length 12.5
  Top Layer w0.3: Q3.1 8.93,34.28 9.35,34.7 10.725,34.7 11,34.975 v1(11,35.8)
  Bottom Layer w0.254: R14.2 12.9,35.425 13.35,35.875 15.625,35.875 16.05,35.45 R12.2
  Bottom Layer w0.3: v1(11,35.8) 12.525,35.8 12.9,35.425
NetQ3_3: Q3.3 R13.1 | length 3.6
  Top Layer w0.3: Q3.3 10.719,32.519 v1(10.719,33.452)
  Bottom Layer w0.3: R13.1 9.667,32.4 v1(10.719,33.452)
NetR1_2: R1.2 U2.1 | length 8.1
  Bottom Layer w0.3: R1.2 29.05,34.475 31.35,36.775 U2.1@31.35,40.075
NetR2_1: R2.1 U2.6 | length 5.3
  Top Layer w0.254: R2.1 R2.1@14.875,38.075
  Top Layer w0.5: R2.1@14.875,38.075 17.85,38.075 18.645,38.87 U2.6
NetR3_2: R3.2 U2.2 | length 8.1
  Bottom Layer w0.3: R3.2 26.7,34.525 28.81,36.635 U2.2@28.81,40.075
NetR5_2: R5.2 U3.2 | length 3
  Bottom Layer w0.3: U3.2 6.425,25 R5.2@6.45,24.975
NetR8_2: R8.2 U3.3 | length 3.5
  Bottom Layer w0.3: U3.3 4.76,28.8 R8.2
NetR13_2: R13.2 U3.4 | length 4.8
  Bottom Layer w0.3: U3.4 3.5,31.415 4.485,32.4 R13.2
NSRT: B1.1 C5.1 P2.4 R15.1 U4.7 | length 53
  Top Layer w0.3: U4.7 22.65,20.244 23.425,19.469 v1(23.425,16.65) ; v2(25.025,8.675) 27,6.7 B1.1
  Bottom Layer w0.3: C5.1 27.991,2.95 26.9,2.95 25.025,4.825 v2(25.025,8.675) ; R15.1 25.975,7.725 v2(25.025,8.675) ; P2.4 24.865,26.79 23.475,25.4 23.475,16.7 v1(23.425,16.65) 23.425,10.275 v2(25.025,8.675)
OSCIN: C8.2 U4.5 Y1.1 | length 7.1
  Top Layer w0.3: U4.5 23.65,21.975 23.65,22.382 24.403,23.135 C8.2 24.403,24.378 25.625,25.6 Y1.1
OSCOUT: C9.2 U4.6 Y1.2 | length 6.9
  Top Layer w0.3: Y1.2 21.525,25.15 22.025,24.65 C9.2 22.025,23.135 23.15,22.01 U4.6
RED: R4.1 U4.25 | length 17.3
  Top Layer w0.3: v1(17.919,10.727) 19.227,10.727 20.15,11.65 U4.25
  Bottom Layer w0.3: R4.1 15.475,11.175 15.923,10.727 v1(17.919,10.727)
RX: U1.3 U4.31 | length 16.3
  Top Layer w0.3: U1.3 17.545,2.128 18.573,1.1 20.837,1.1 21.375,1.638 21.375,7.875 23.15,9.65 U4.31
RX3: U2.4 U4.22 | length 29.8
  Top Layer w0.3: v1(16.9,15) U4.22
  Bottom Layer w0.3: v1(16.9,15) 16.9,22.801 18.498,24.399 18.498,26.547 23.73,31.779 U2.4@23.73,40.075
STATE: U1.1 U4.32 | length 10.8
  Top Layer w0.3: U1.1 22.625,7.552 23.65,8.577 U4.32
SWCLK: P2.3 R16.2 U4.37 | length 27.8
  Top Layer w0.3: U4.37 29.525,14 30.425,14.9 v1(30.425,15.85) 30.425,16.9 35.775,22.25 35.775,25.525 P2.3
  Bottom Layer w0.3: v1(30.425,15.85) 32.975,15.85 34.85,17.725 37.575,17.725 38.001,18.151 38.001,19.001 R16.2
SWDIO: P2.1 R18.2 U4.34 | length 27.9
  Top Layer w0.3: U4.34 24.65,10.35 25.55,9.45 26.825,9.45 37.04,19.665 P2.1
  Bottom Layer w0.3: R18.2 35.45,22.66 P2.1
SWO: P2.2 R17.2 U4.39 | length 15.7
  Top Layer w0.3: U4.39 27.9,15 34.5,21.6 P2.2
  Bottom Layer w0.3: R17.2 31.675,24.25 P2.2
TX: U1.2 U4.30 | length 11.5
  Top Layer w0.3: U1.2 20.085,7.628 22.65,10.193 U4.30
TX3: U2.3 U4.21 | length 30.8
  Top Layer w0.3: U4.21 17.571,15.5 16.575,16.496 16.575,27.15 26.27,36.845 U2.3@26.27,40.595
VCC3V3: C2.2 C3.2 C4.2 C6.1 C7.1 C11.1 P2.6 R1.1 R10.1 R15.2 R16.1 R17.1 R18.1 U4.1 U4.9 U4.24 U4.36 U4.48 U6.3 | length 40.8
  Top Layer w0.3: v1(16.802,12.25) 16.8,12.252 16.8,13.333 17.468,14 17.875,14 U4.24 ; U4.9 21.65,20.021 21.485,19.855 21.485,18.718 21.725,18.477 v1(21.725,18.288) ; v1(25.625,14.725) 25.65,14.7 U4.36 ; U4.1 25.65,21.799 25.826,21.975 26.361,21.975 26.736,21.6 v1(26.925,21.6) ; U4.48 28.811,19.5 29.161,19.15 v1(29.35,19.15)
  Top Layer w0.508: C11.1@8.6,7.15 8.725,7.275 8.725,8.425 9.675,9.375 12.375,9.375 13.275,10.275 v1(13.275,11.15) 13.288,11.163 13.288,15.088 U6.3@13.3,15.1
  Bottom Layer w0.254: R1.1 R1.1@31.026,32.976
  Bottom Layer w0.381: C6.1 C6.1@29.081,20.506 ; v1@30.444,20.506 v1(30.475,20.475)
  Bottom Layer w0.508: v1@13.25,11.175 v1(13.275,11.15) ; v1(16.802,12.25) 16.807,12.255 16.807,13.57 C7.1 ; C3.2@24.725,21.576 24.73,21.581 26.906,21.581 v1(26.925,21.6) ; v1(25.625,14.725) 25.638,14.713 25.638,13.551 C4.2 ; C6.1@29.081,20.506 v1@30.444,20.506 ; R1.1@31.026,32.976 31.127,32.875 v1(32.725,32.875) ; R17.1 31.725,22.3 33.225,22.3 v1(33.3,22.225) ; R15.2@32.49,7.725 32.49,9.259 33.125,9.894 v2(33.125,9.925) ; v1(33.675,19.025) R18.1 ; R16.1 38.025,22.075 v1(38.775,22.825)
  other v1: 32.8,13.9
VCC5V: C10.1 R2.2 U1.5 U3.1 U5.2 U6.1 | length 9
  Top Layer w0.508: U5.2 8.814,12.598 C10.1 8.7,12.712 U6.1 ; v1(11.2,38) 12.9,38 R2.2
pads on no net: B1.2 B1.4 U4.3 U4.4 U4.11 U4.12 U4.13 U4.14 U4.15 U4.16 U4.17 U4.18 U4.19 U4.20 U4.28 U4.33 U4.38 U4.40 U4.41 U4.42 U4.43 U4.45 U4.46 U5.1

## Polygon pours and split planes (outlines as drawn)
GND on GND (split plane): 33.2,37.3 35.1,35.4 39.49,35.4 39.49,6.7 35.3,6.7 33.9,5.3 33.9,0.51 8.39,0.51 7.2,1.7 7.2,3.3 4.2,6.3 0.51,6.3 0.51,34.225 5.725,34.225 6.925,35.425 6.925,41.49 33.2,41.49
VCC5V on VCC (split plane): 16.648,40.025 16.648,38.856 16.648,38.475 16.648,35.279 12.697,31.328 12.657,31.276 12.631,31.215 12.623,31.15 12.623,30.65 12.623,9.6 12.623,4.3 12.623,3.625 12.623,1.804 11.671,0.852 8.704,0.852 7.552,2.004 7.552,3.325 7.544,3.39 7.518,3.451 7.478,3.503 4.553,6.428 4.501,6.468 4.44,6.494 4.375,6.502 0.51,6.502 0.51,33.554 1.182,34.225 5.725,34.225 6.925,35.425 6.925,41.262 7.067,41.404 7.107,41.456 7.121,41.49 16.648,41.49
VCC3V3 on VCC (split plane): 33.2,37.3 35.1,35.4 39.49,35.4 39.49,6.7 35.3,6.7 33.9,5.3 33.9,0.51 12.042,0.51 13.053,1.522 13.071,1.544 13.093,1.574 13.119,1.635 13.127,1.7 13.127,3.625 13.127,4.3 13.127,9.6 13.127,30.65 13.127,31.046 17.078,34.997 17.096,35.019 17.118,35.049 17.144,35.11 17.152,35.175 17.152,41.49 33.2,41.49

## Other copper
GND (plane layer: these items are gaps in the copper):
  region: 33.2,37.3 35.1,35.4 39.7,35.4 39.7,41.7 33.2,41.7
  region: 33.9,0 33.9,5.3 35.3,6.7 39.6,6.7 39.6,0.1
  region: 0.5,0.5 8.4,0.5 7.2,1.7 7.2,3.3 4.2,6.3 0.5,6.3
  region: 0.481,41.481 0.75,41.75 6.925,41.75 6.925,35.425 5.725,34.225 0.45,34.225
VCC (plane layer: these items are gaps in the copper):
  region: 33.9,0 33.9,5.3 35.3,6.7 39.6,6.7 39.6,0.1
  region: 33.2,37.3 35.1,35.4 39.7,35.4 39.7,41.7 33.2,41.7
  region: 0.5,0.5 8.4,0.5 7.2,1.7 7.2,3.3 4.2,6.3 0.5,6.3
  region: 0.5,0.5 8.4,0.5 7.2,1.7 7.2,3.3 4.2,6.3 0.5,6.3
  region: 0.481,41.481 0.75,41.75 6.925,41.75 6.925,35.425 5.725,34.225 0.45,34.225
  lines w0.5: 0.225,7.35 0.225,6.25 4.375,6.25 7.3,3.325 7.3,1.9 8.6,0.6 11.775,0.6 12.875,1.7 12.875,3.625 12.875,4.3 12.875,9.6 12.875,30.65 12.875,31.15 16.9,35.175 16.9,42 ; 6.025,38.95 6.2,38.95 ; 16.9,38.475 16.9,38.95 ; 16.9,38.713 16.9,39 ; 16.9,38.856 16.9,40.025 ; 1.175,34.575 0.175,33.575 1.175,34.575 ; 1.175,34.575 1.175,34.575 ; 5.914,40.607 6.889,41.582 5.914,40.607

## Silkscreen, mask and mechanical layers (free items; w line width, h text height)
Bottom Overlay:
  lines w0.1: 31.475,18.05 34.625,18.05
Board Shape:
  lines w0.5: 0,0 40,0 40,40 0,40 0,0